# EAGLE board loadCell_Amplifier_v2.0 (EAGLE 8.0.0)
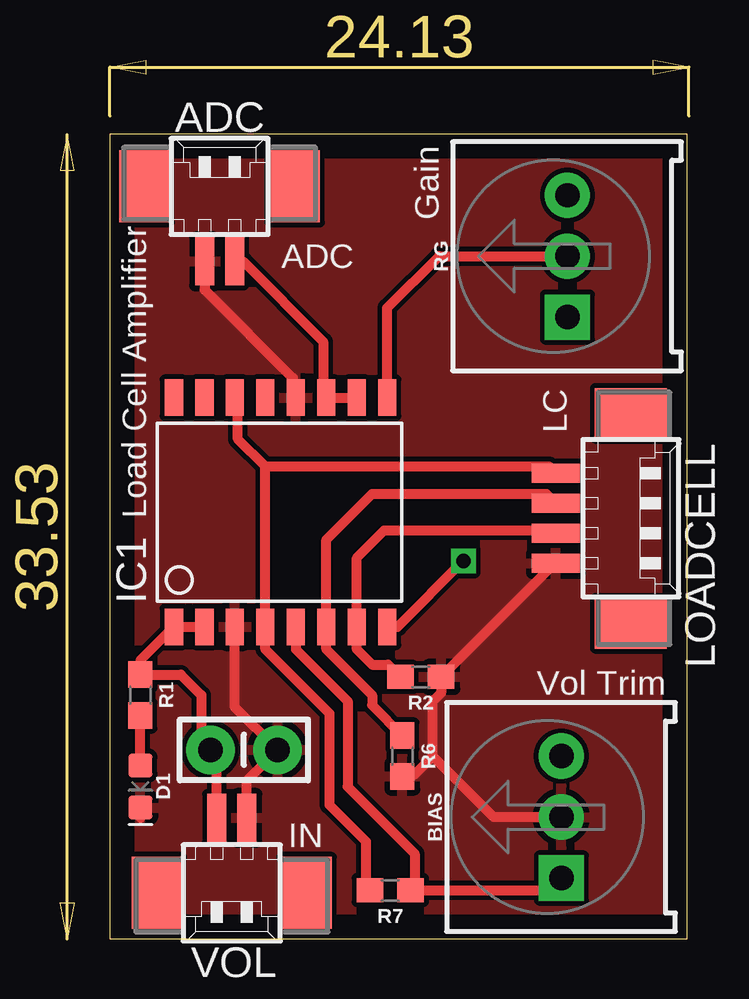
[diagram p0: board, top side]
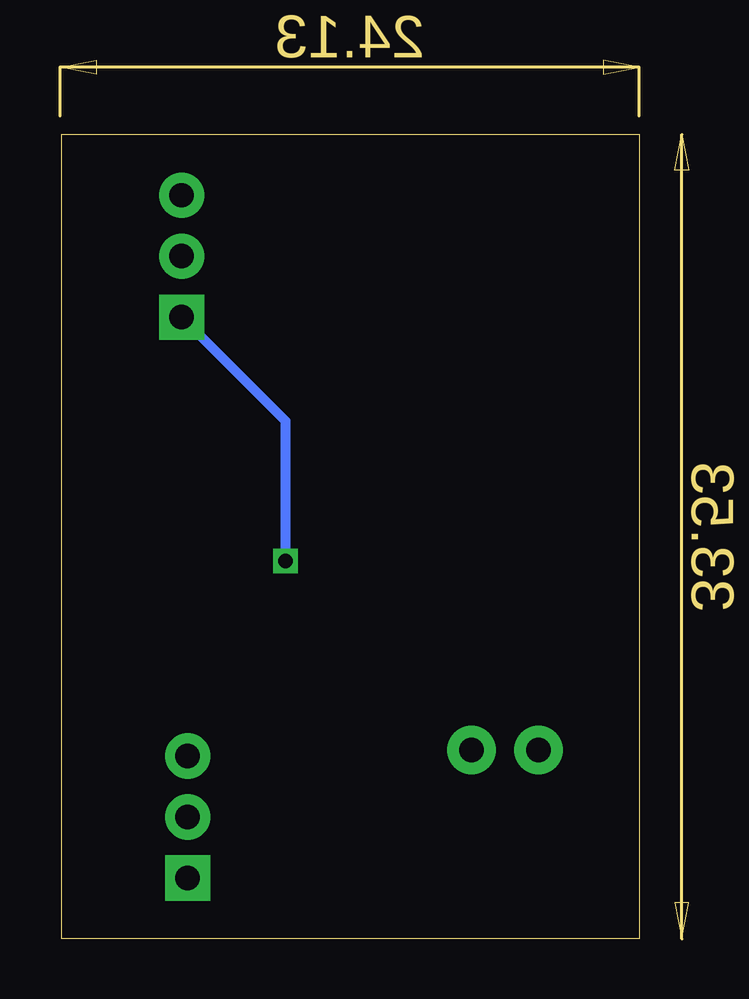
[diagram p1: board, bottom side, seen from below]

Size 24.05 x 33.52 mm. Coordinates in mm from the lower left corner, seen from the top.
Outline: 0,0 24.05,0 24.05,33.52 0,33.52 0,0
Copper layers (1*16): Top 0.035mm / dielectric 1.5mm / Bottom 0.035mm
Design rules "default": minimum track width 10mil, minimum drill 24mil, track to track 8mil, track to pad 8mil, pad to pad 8mil, via to via 8mil, smd to smd 8mil, copper to edge 40mil, drill to drill 8mil, minimum pad ring 10mil, minimum via ring 8mil, stop-mask expansion 4mil, vias tented up to drill 0mil, thermal gap 10mil

## Footprints (pad centres in the part's own frame; a part is rotated, then mirrored left to right if it is on the bottom)
53261-02 = smd 0.8 x 2: 1 0.625,-2.5; 2 -0.625,-2.5 | smd 2.1 x 3: S1 3.125,0.625; S2 -3.125,0.625
TRIMPOT-PTH-3386U = drill 1.016 pad 1.88 square: 1 -2.54,-0.015 | drill 1.016 pad 1.88: 2 0,-0.015; 3 2.54,-0.015
CAP-PTH-SMALL-KIT = drill 1.016 pad 2.032: 1 -1.397,0; 2 1.397,0
LED-0603 = smd 1 x 1: A -0.877,0; C 0.877,0
SO16-1 = smd 0.762 x 1.524: 1 -4.445,-4.775; 2 -3.175,-4.775; 3 -1.905,-4.775; 4 -0.635,-4.775; 5 0.635,-4.775; 6 1.905,-4.775; 7 3.175,-4.775; 8 4.445,-4.775; 9 4.445,4.775; 10 3.175,4.775; 11 1.905,4.775; 12 0.635,4.775; 13 -0.635,4.775; 14 -1.905,4.775; 15 -3.175,4.775; 16 -4.445,4.775
53261-04 = smd 0.8 x 2: 1 1.875,-2.5; 2 0.625,-2.5; 3 -0.625,-2.5; 4 -1.875,-2.5 | smd 2.1 x 3: S1 4.375,0.625; S2 -4.375,0.625
0603 = smd 1.1 x 1: 1 -0.85,0; 2 0.85,0

## Placement (x,y rotation side)
ADC  53261-02  [53261-02]  4.57,30.73 0 top
BIAS  10k  [TRIMPOT-PTH-3386U]  18.8,5.08 90 top
C2  0.1uF  [CAP-PTH-SMALL-KIT]  5.59,7.87 180 top
D1  [LED-0603]  1.27,6.35 270 top
IC1  INA125U  [SO16-1]  7.11,17.78 0 top
LOADCELL  53261-04  [53261-04]  21.08,17.53 270 top
R1  330  [0603]  1.27,10.16 270 top
R2  10k  [0603]  12.95,10.92 180 top
R6  10k  [0603]  12.19,7.62 270 top
R7  10k  [0603]  11.68,2.03 180 top
RG  10k  [TRIMPOT-PTH-3386U]  19.05,28.45 90 top
VOL  53261-02  [53261-02]  5.08,2.54 180 top

## Library data of the parts
ADC VOL = con-molex; OC_FARNELL: 1125373; OC_NEWARK: unknown
BIAS RG = SparkFun-Resistors; PROD_ID: RES-09730; SF_SKU: COM-09806
C2 = SparkFun-Capacitors; PROD_ID: CAP-08370
D1 = SparkFun-LED
IC1 = burr-brown; MF: TEXAS INSTRUMENT CONNECTORS; MPN: INA125U; OC_FARNELL: 1304375; OC_NEWARK: 80K5901
LOADCELL = con-molex; OC_FARNELL: 1125374; OC_NEWARK: unknown
R1 R2 R6 R7 = SparkFun-Resistors; PROD_ID: RES-12535

## Nets
GND: ADC.2 BIAS.2 C2.1 D1.C IC1.3 IC1.12 LOADCELL.1 R2.1 R6.2 VOL.2
IAREF: BIAS.1 IC1.5 R7.1
N$3: IC1.8 RG.1
N$4: IC1.9 RG.2
N$6: D1.A R1.2
V+: IC1.6 LOADCELL.3 R6.1
V-: IC1.7 LOADCELL.2 R2.2
V_2.5: IC1.4 IC1.14 LOADCELL.4 R7.2
VIN: C2.2 IC1.1 IC1.2 R1.1 VOL.1
VO: ADC.1 IC1.10 IC1.11

## Tracks (layer width: path | path; a pad name or v marks a point on that pad's centre or on a via)
GND
  Top 0.406: 1.27,5.04 D1.C | IC1.3 5.21,9.65 C2.1 5.7,6.59 VOL.2 | 13.46,7.62 13.46,9.91 13.8,10.25 R2.1 18.53,15.65 LOADCELL.1 | 13.46,7.62 12.7,6.86 12.28,6.86 R6.2 | BIAS.2 16,5.08 13.46,7.62 | ADC.2 3.95,27.04 7.62,23.37 7.62,22.68 IC1.12
  pour Top: 0,33.53 23.88,33.53 23.88,33.27 23.88,0 0,0 0,2.79
IAREF
  Top 0.406: 7.75,12.66 IC1.5 7.75,12.06 9.91,9.91 9.91,6.35 12.7,3.56 12.7,2.2 R7.1 18.3,2.03 BIAS.1
N$3  (via drill 0.6)
  Top 0.406: IC1.8 11.99,13 v14.73,15.75
  Bottom 0.406: v14.73,15.75 14.73,21.57 RG.1
N$4
  Top 0.406: IC1.9 11.56,26.29 13.72,28.45 RG.2
N$6
  Top 0.406: D1.A R1.2
V+
  Top 0.406: R6.1 10.92,9.74 10.92,10.16 9.02,12.06 IC1.6 9.02,16.64 10.92,18.54 18.19,18.54 LOADCELL.3
V-
  Top 0.406: R2.2 11.6,11.43 10.92,11.43 10.29,12.06 IC1.7 10.29,15.88 11.43,17.02 18.46,17.02 LOADCELL.2
V_2.5
  Top 0.406: R7.2 10.67,2.2 10.67,4.06 9.14,5.59 9.14,9.4 6.48,12.06 IC1.4 6.48,19.68 | 6.48,19.68 5.33,20.83 5.33,22.43 IC1.14 | 6.48,19.68 18.3,19.68 LOADCELL.4
VIN
  Top 0.406: IC1.2 IC1.1 1.27,11.61 R1.1 2.96,11.01 3.81,10.16 3.81,8.25 C2.2 4.45,7.61 VOL.1
VO
  Top 0.406: IC1.10 IC1.11 8.89,22.68 8.89,24.89 5.55,28.23 ADC.1

## Text on the board
tPlace: Gain | ADC | LC | Load Cell Amplifier | Vol Trim | IN